# Altium PCB SwitchDecoder.PcbDoc
Units mm, origin at the board's own origin, x right, y up, seen from the top; angles counter-clockwise.
Board outline 152.4 x 101.6 mm, 2 copper layers (Top Layer, Bottom Layer); 67 components, 51 nets, 199 pads, 20 vias.
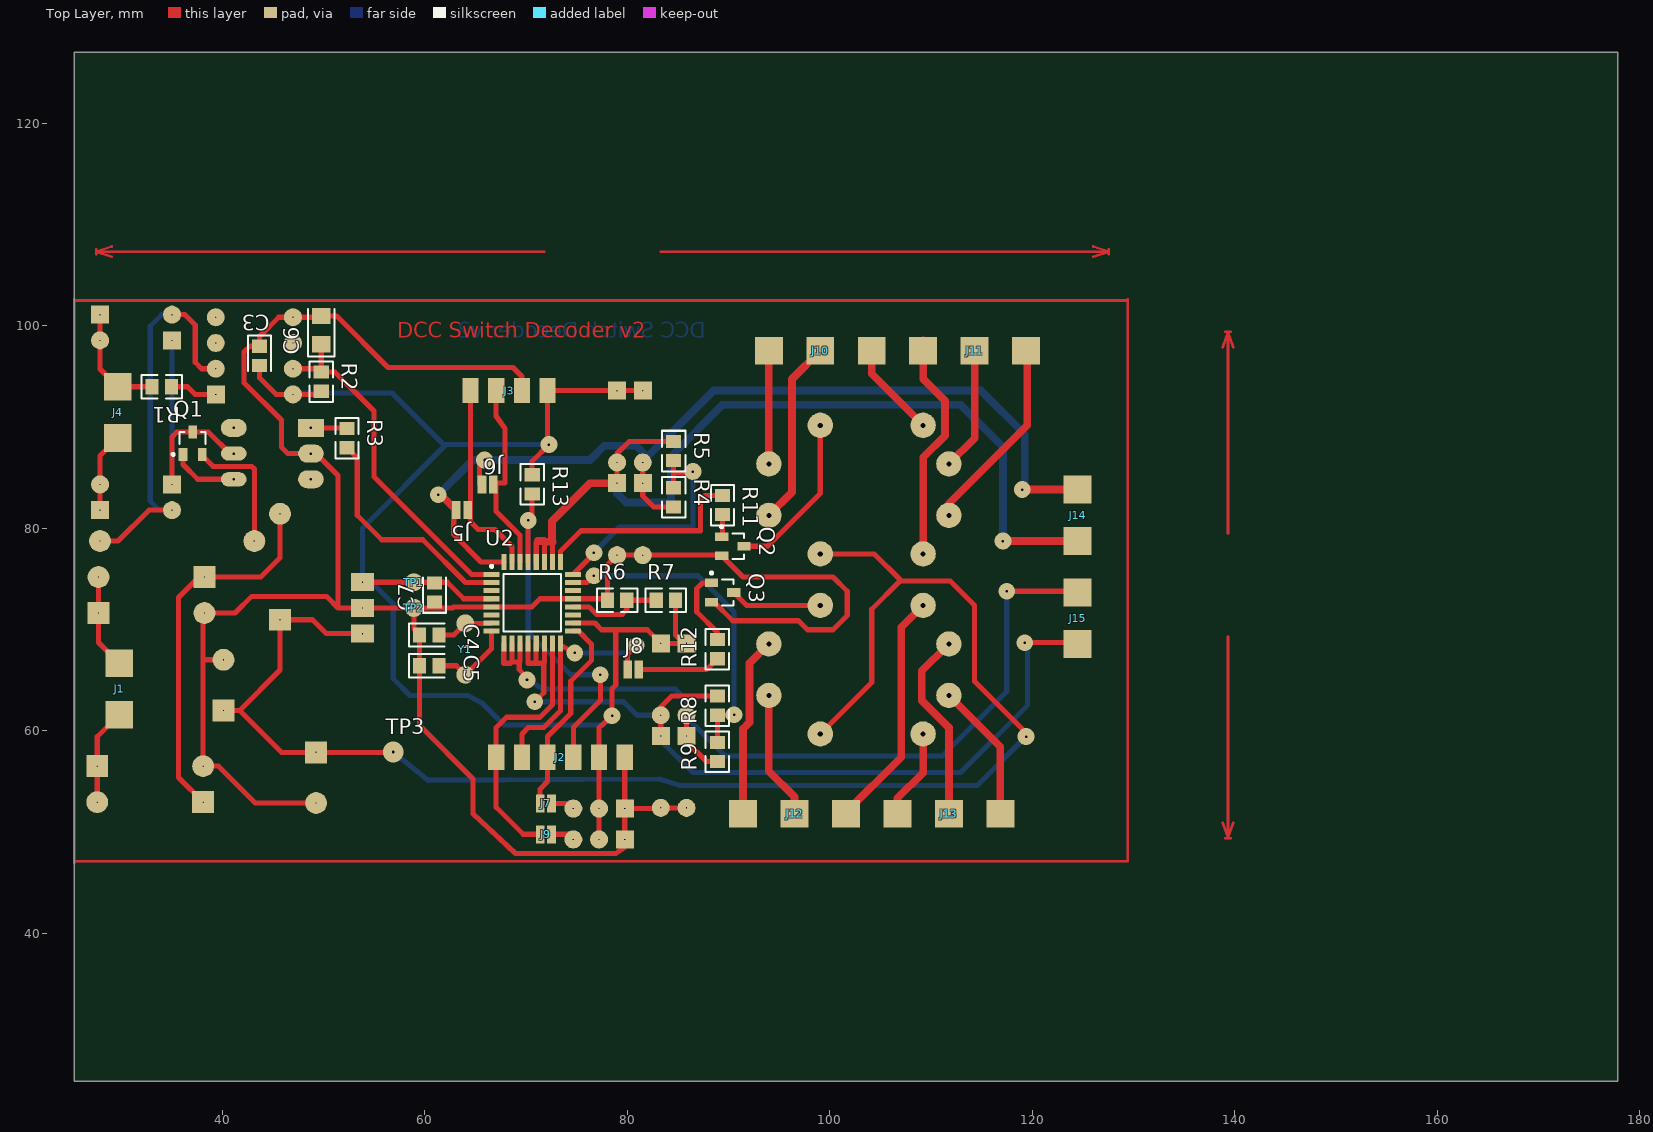
[diagram p0: Top Layer view]
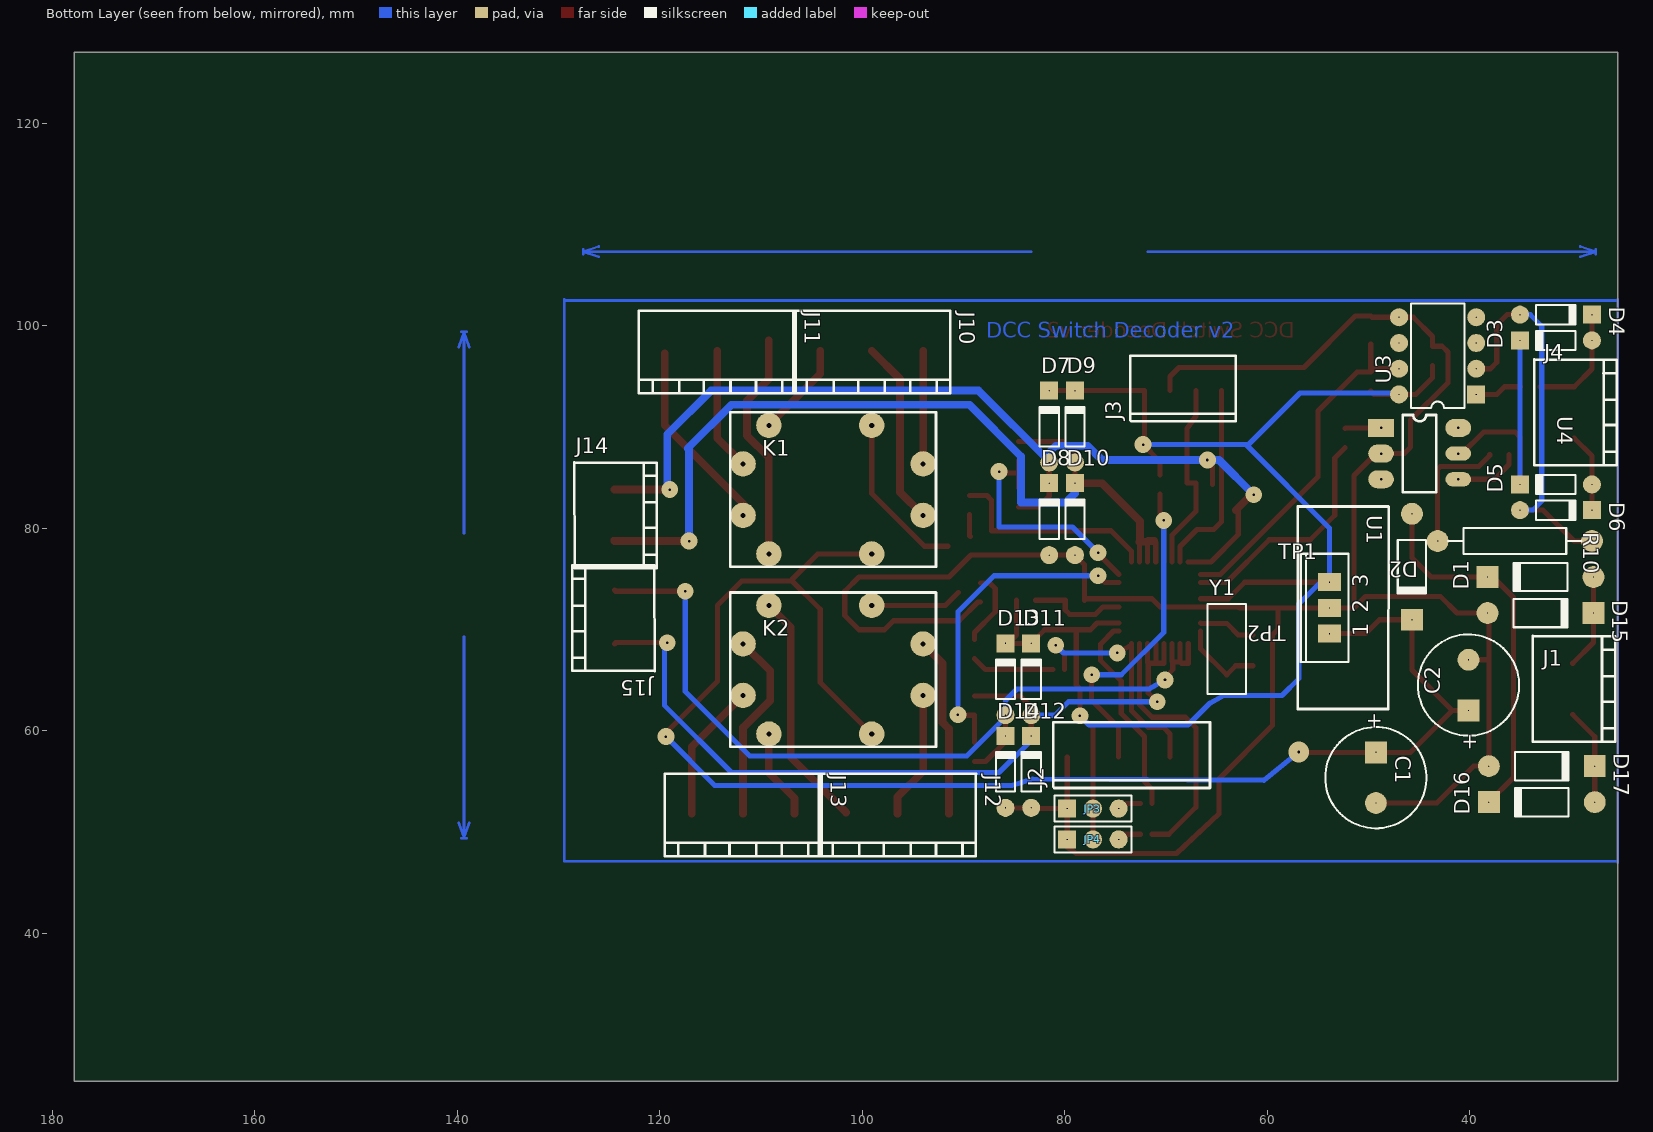
[diagram p1: Bottom Layer view, seen from below]

## Layer stack, top to bottom
Top Layer: signal copper 0.0356
Dielectric: dielectric 0.32, FR-4, Dk 4.8
Bottom Layer: signal copper 0.0356

## Board outline
25.4,25.4 177.8,25.4 177.8,127 25.4,127

## Design rules (kind name [scope] priority, off if disabled: settings)
Clearance [All] p1: gap=0.254
ComponentClearance [All] p1: gap=0.254 collisioncheckmode=0
PolygonConnect [All] p1: connectstyle=Relief reliefconductorwidth=0.254 reliefentries=4 polygonreliefangle="90 Angle"
RoutingLayers [All] p1: top layer=Horizontal bottom layer=Vertical
RoutingVias [All] p1: holewidth=0.711 width=1.27 viastyle="Through Hole" minholewidth=0.711 minwidth=1.27 maxholewidth=0.711 maxwidth=1.27
SolderMaskExpansion [All] p1: expansion=0.102
TestPointUsage [All] p1: valid=0 allowmultiple=FALSE
Testpoint [All] p1: side=15 testpointundercomponent=TRUE minsize=1.016 maxsize=2.54 preferedsize=1.524 minholesize=0 maxholesize=1.016 preferedholesize=0.813 testpointgrid=0.025 style=1023 order=1234567890
Width [All] p1: maxlimit=1.27 minlimit=0.254 preferedwidth=0.508
16 further rules are at their usual default settings.

## Components (designator, comment, footprint, x,y, rotation, side; value= is the part's Value field where it differs from the comment)
C1 "Cap Pol1" CAPPR5-10X10.5 49.276,55.372 r270 bottom
C2 "Cap Pol1" CAPPR5-10X10.5 40.132,64.516 r90 bottom
C3 "Cap" CC2012-0805 43.688,97.028 r270 top
C4 "Cap" CC2012-0805 60.452,69.469 r0 top
C5 "Cap" CC2012-0805 60.452,66.421 r0 top
C6 "Cap Pol1" CC3216-1206 49.784,99.568 r90 top
C7 "Cap" CC2012-0805 60.96,73.66 r90 top
D1 "Diode 1N4004" DIO10.46-5.3x2.8 33.02,75.184 r0 bottom
D2 "Diode 1N4001" DIO10.46-5.3x2.8 45.72,76.2 r270 bottom
D3 "Diode 1N4148" DIO7.1-3.9x1.9 31.496,98.552 r0 bottom
D4 "Diode 1N4148" DIO7.1-3.9x1.9 31.496,101.092 r180 bottom
D5 "Diode 1N4148" DIO7.1-3.9x1.9 31.496,84.328 r0 bottom
D6 "Diode 1N4148" DIO7.1-3.9x1.9 31.496,81.788 r180 bottom
D7 "Diode 1N4148" DIO7.1-3.9x1.9 81.534,90.043 r90 bottom
D8 "Diode 1N4148" DIO7.1-3.9x1.9 81.534,80.899 r90 bottom
D9 "Diode 1N4148" DIO7.1-3.9x1.9 78.994,90.043 r90 bottom
D10 "Diode 1N4148" DIO7.1-3.9x1.9 78.994,80.899 r90 bottom
D11 "Diode 1N4148" DIO7.1-3.9x1.9 83.312,65.09 r90 bottom
D12 "Diode 1N4148" DIO7.1-3.9x1.9 83.312,55.946 r90 bottom
D13 "Diode 1N4148" DIO7.1-3.9x1.9 85.852,65.09 r90 bottom
D14 "Diode 1N4148" DIO7.1-3.9x1.9 85.852,55.946 r90 bottom
D15 "Diode 1N4004" DIO10.46-5.3x2.8 33.02,71.628 r180 bottom
D16 "Diode 1N4004" DIO10.46-5.3x2.8 32.893,52.959 r0 bottom
D17 "Diode 1N4004" DIO10.46-5.3x2.8 32.893,56.515 r180 bottom
J1 "12V AC" "Screw Terminal 2 way 0.2" 27.305,59.055 r180 bottom
J2 "ISP Connector" "0.1 SIP 6 PIN" 74.676,59.944 r90 bottom
J3 "RS232 CONNECTOR" "0.1 SIP 4 PIN" 67.056,96.139 r90 bottom
J4 "Track Power" "Screw Terminal 2 way 0.2" 27.153,86.36 r180 bottom
J5 "Jumper" JUMPER 61.976,81.788 r180 top
J6 "Jumper" JUMPER 64.516,84.328 r180 top
J7 "Jumper" JUMPER 73.66,52.832 r0 top
J8 "Jumper" JUMPER 82.296,66.04 r0 top
J9 "Jumper" JUMPER 73.66,49.784 r0 top
J10 "Screw Terminal 3 Way" "Screw Terminal 3 way 0.2" 101.6,94.996 r270 bottom
J11 "Screw Terminal 3 Way" "Screw Terminal 3 way 0.2" 116.84,94.996 r270 bottom
J12 "Screw Terminal 3 Way" "Screw Terminal 3 way 0.2" 99.06,49.276 r270 bottom
J13 "Screw Terminal 3 Way" "Screw Terminal 3 way 0.2" 114.3,49.276 r270 bottom
J14 "Screw Terminal 2 Way" "Screw Terminal 2 way 0.2" 121.92,76.2 r180 bottom
J15 "Screw Terminal 2 Way" "Screw Terminal 2 way 0.2" 127,76.2 r0 bottom
JP3 "Header 3" HDR1X3 79.756,52.324 r180 bottom
JP4 "Header 3" HDR1X3 79.756,49.276 r180 bottom
K1 "Relay-DPDT" RelayDPDT 104.14,81.28 r180 bottom
K2 "Relay-DPDT" RelayDPDT 104.14,63.5 r180 bottom
Q1 "MMBT100A" SO-G3 37.084,88.392 r0 top
Q2 "MMBT100A" SO-G3 90.424,78.232 r270 top
Q3 "MMBT100A" SO-G3 89.408,73.66 r270 top
R1 "Res2" CR2012-0805 34.036,93.98 r180 top
R2 "Res2" CR2012-0805 49.784,94.488 r270 top
R3 "Res2" CR2012-0805 52.324,88.9 r270 top
R4 "Res2" CR2012-0805 84.582,83.058 r270 top
R5 "Res2" CR2012-0805 84.582,87.63 r270 top
R6 "Res2" CR2012-0805 78.994,72.898 r0 top
R7 "Res2" CR2012-0805 83.82,72.898 r0 top
R8 "Res2" CR2012-0805 88.9,62.484 r90 top
R9 "Res2" CR2012-0805 88.9,57.912 r90 top
R10 "1 Watt" AXIAL-0.6 35.56,78.74 r180 bottom
R11 "Res2" CR2012-0805 89.408,82.296 r270 top
R12 "Res2" CR2012-0805 88.9,68.072 r90 top
R13 "Res2" CR2012-0805 70.612,84.328 r270 top
TP1 "Test Point" TestPoint#1 58.928,74.676 r180 bottom
TP2 "Test Point" TestPoint#1 58.928,72.136 r270 bottom
TP3 "Test Point" TestPoint#2 56.896,57.912 r90 top
U1 "LM7805CT" "TO-3 with HS Clip" 53.848,72.136 r180 bottom
U2 "AT90LS4433-4AC" 32A 70.612,72.644 r0 top
U3 "HCPL-2530 Opto Coupler" 8P3 43.18,97.028 r90 bottom
U4 "4N25 Opto Coupler" DIP6 48.768,89.916 r180 bottom
Y1 "XTAL" RAD-0.2 64.008,68.072 r90 bottom

## Footprints (in the part's own frame and the unit in brackets; to place one, negate y for a bottom-side part, rotate by r counter-clockwise, add the part's x,y. Pads: shape width x height; smd on the part's side, far side on the other; paste and mask are expansions set on the pad)
"0.1 SIP 4 PIN" [mm] "0.1 SIP 4 PIN"
  rect 2.5x1.6 smd far side: 1(-2.54,5.08) 2(-2.54,2.54) 3(-2.54,0) 4(-2.54,-2.54)
  silkscreen extent -5.59,-3.94 0.89,6.48
"0.1 SIP 6 PIN" [mm] "0.1 SIP 6 PIN"
  rect 2.5x1.6 smd far side: 1(-2.54,5.08) 2(-2.54,2.54) 3(-2.54,0) 4(-2.54,-2.54) 5(-2.54,-5.08) 6(-2.54,-7.62)
  silkscreen extent -5.59,-9.02 0.89,6.48
8P3 [mil] "DIP; 8 Leads; Row Spacing 7.62 mm; Pitch 2.54 mm"
  rect 70x70 hole 5: 1(-150,-150)
  round 70 hole 5: 2(-50,-150) 3(50,-150) 4(150,-150) 5(150,150) 6(50,150) 7(-50,150) 8(-150,150)
  silkscreen extent -203,-104 203,104
32A [mm] "QFP; 32 Leads; Body 7 x 7 mm; Pitch 0.8 mm"
  rect 1.55x0.5 smd: 1(-4.025,2.8) 2(-4.025,2) 3(-4.025,1.2) 4(-4.025,0.4) 5(-4.025,-0.4) 6(-4.025,-1.2) 7(-4.025,-2) 8(-4.025,-2.8) 17(4.025,-2.8) 18(4.025,-2) 19(4.025,-1.2) 20(4.025,-0.4) 21(4.025,0.4) 22(4.025,1.2) 23(4.025,2) 24(4.025,2.8)
  rect 0.5x1.55 smd: 9(-2.8,-4.025) 10(-2,-4.025) 11(-1.2,-4.025) 12(-0.4,-4.025) 13(0.4,-4.025) 14(1.2,-4.025) 15(2,-4.025) 16(2.8,-4.025) 25(2.8,4.025) 26(2,4.025) 27(1.2,4.025) 28(0.4,4.025) 29(-0.4,4.025) 30(-1.2,4.025) 31(-2,4.025) 32(-2.8,4.025)
  silkscreen extent -4.12,-2.85 2.85,3.72
AXIAL-0.6 [mil]
  round 85 hole 5: 1(-300,0) 2(300,0)
  silkscreen extent -260,-50 260,50
CAPPR5-10X10.5 [mil]
  rect 85x85 hole 5: 1(-98.43,0)
  round 85 hole 5: 2(98.43,0)
  silkscreen extent -197,-197 197,197
CC2012-0805 [mm]
  rect 1.3x1.5 smd: 1(-0.95,0) 2(0.95,0)
  silkscreen extent -2,-1.15 1.5,1.15
CC3216-1206 [mm]
  rect 1.6x1.8 smd: 1(-1.4,0) 2(1.4,0)
  silkscreen extent -2.6,-1.3 2.1,1.3
CR2012-0805 [mm]
  rect 1.3x1.5 smd: 1(-0.95,0) 2(0.95,0)
  silkscreen extent -2,-1.15 2,1.15
DIO7.1-3.9x1.9 [mil]
  round 70 hole 5: 1(-139.76,0)
  rect 70x70 hole 5: 2(139.76,0)
  silkscreen extent -77,-37 81,37
DIO10.46-5.3x2.8 [mil]
  round 85 hole 5: 1(-205.91,0)
  rect 85x85 hole 5: 2(205.91,0)
  silkscreen extent -104,-56 108,55
DIP6 [mil]
  rect 100x70 hole 10: 1(0,0)
  oval 100x70 hole 10: 2(0,-100) 3(0,-200) 6(300,0)
  oval 100x55 hole 10: 4(300,-200) 5(300,-100)
  silkscreen extent 85,-250 215,50
HDR1X3 [mil] "Connector; Header; 3 Position"
  rect 70x70 hole 5: 1(0,0)
  round 70 hole 5: 2(100,0) 3(200,0)
  silkscreen extent -50,-50 250,50
JUMPER [mil]
  rect 33.46x70 smd: 1(-89,0) 2(-45,0)
RAD-0.2 [mil]
  round 70 smd far side: 1(-100,0) 2(100,0)
  silkscreen extent -175,-75 175,75
RelayDPDT [mm]
  round 2.5 hole 0.5: 1(10.16,5.08) 2(-5.08,8.89) 3(-7.62,5.08) 4(10.16,0) 5(-5.08,-3.81) 6(-7.62,0) 7(5.08,8.89) 8(5.08,-3.81)
  silkscreen extent -8.89,-5.08 11.43,10.16
"Screw Terminal 2 way 0.2" [mm]
  rect 2.75x2.75 smd far side: 1(-2.54,7.62) 2(-2.54,2.54)
  silkscreen extent -6.5,-0.15 1.65,10.31
"Screw Terminal 3 way 0.2" [mm]
  rect 2.75x2.75 smd far side: 1(-2.54,7.62) 2(-2.54,2.54) 3(-2.54,-2.54)
  silkscreen extent -6.5,-5.21 1.65,10.31
SO-G3 [mm]
  rect 0.85x1.3 smd: 1(-0.95,-1.1) 2(0.95,-1.1) 3(0,1.1)
  silkscreen extent -2.05,-1.22 1.28,1.1
TestPoint#1 [mil]
  round 70 smd far side: 1(0,0)
TestPoint#2 [mil]
  round 70 smd: 1(0,0)
"TO-3 with HS Clip" [mil]
  rect 90x70 hole 5: 1(0,-100) 2(0,0) 3(0,100)
  silkscreen extent -124,-393 230,394

## Part data
C1 C2 C6: "Polarized Capacitor (Radial)"
C3 C4 C5 C7: "Capacitor"
D1 D2 D15 D16 D17: "1 Amp General Purpose Rectifier"
D3 D4 D5 D6 D7 D8 D9 D10 D11 D12 D13 D14: "High Conductance Fast Diode"
J1 J4: library part "SIP2 CONNECTOR"
JP3 JP4: "Header, 3-Pin"
K1 K2: "Dual-Pole Dual-Throw Relay"
Q1 Q2 Q3: "General Purpose Amplifier NPN Silicon"
R1 R2 R3 R4 R5 R6 R7 R8 R9 R11 R12 R13: "Resistor"
R10: library part Res2, "Resistor"
TP1 TP2 TP3: library part TestPoint
U1: "Series 3-Terminal Positive Regulator"
U2: "8-Bit AVR Microcontroller with 4K Bytes of In-System Programmable Flash Memory"
U3: library part HCPL-2601
U4: library part 4N25
Y1: "Crystal Oscillator"

## Via types
v1: diameter 1.651, hole 0.254, Top Layer to Bottom Layer, 19 vias
v2: diameter 2.032, hole 0.254, Top Layer to Bottom Layer, 1 vias

## Nets (pads, with @x,y where several pads share a name; then routed paths per layer and width w, separated by ;. In a path a pad name is that pad's centre, name@x,y a point inside that pad or via, vN(x,y) a via of type N, cw(c..) or ccw(c..) an arc to the next point about the centre after c; other vN are vias at no path point)
ACK: R3.2 U2.2 | length 23.1
  Top Layer w0.508: R3.2 53.34,86.934 53.34,81.28 55.753,78.867 59.817,78.867 64.04,74.644 U2.2
DCCIN: C6.1 R2.1 U2.1 U3.7 | length 34.5
  Top Layer w0.508: U3.7 49.464,95.758 R2.1 ; C6.1 R2.1 ; U2.1 64.637,75.444 54.991,85.09 54.991,91.567 51.12,95.438 R2.1
GND: C1.2 C2.2 C3.1 C4.1 C5.1 C6.2 C7.1 D8.1 D10.1 D12.1 D14.1 D15.1 D17.1 J2.1 J3.2 JP3.1 JP4.1 Q2.2 Q3.2 R6.1 TP2.1 U1.2 U2.5 U2.21 U3.5 U4.2 | length 236
  Top Layer w0.508: 38.163,67.016 C2.2 ; C1.2 43.267,52.872 39.624,56.515 D17.1 38.123,71.501 D15.1 41.275,71.628 42.926,73.279 50.292,73.279 51.435,72.136 ; C6.2@49.654,100.838 45.593,100.838 43.688,98.933 C3.1 42.733,97.978 42.164,97.409 42.164,94.361 45.847,90.678 45.847,88.011 46.482,87.376 49.276,87.376 51.435,85.217 51.435,72.136 ; C6.2 51.305,100.968 56.388,95.885 68.707,95.885 69.596,94.996 J3.2 ; TP2.1 58.928,70.043 C4.1 59.502,60.513 64.77,55.245 64.77,51.816 68.961,47.879 78.867,47.879 79.756,48.514 J2.1 ; R6.1@77.898,73.044 71.393,73.044 70.593,72.244 62.846,72.244 62.738,72.136 51.435,72.136 ; R6.1 78.044,76.399 D10.1 89.257,77.349 91.422,75.184 100.33,75.184 101.727,73.787 101.727,71.374 100.33,69.977 97.79,69.977 96.901,70.866 90.424,70.866 88.58,72.71 Q3.2 ; JP3.1 83.24,52.324 D12.1 D14.1
NetC4_2: C4.2 U2.7 Y1.2 | length 5.7
  Top Layer w0.508: C4.2 62.865,69.469 Y1.2 66.555,70.612 U2.7
NetC5_2: C5.2 U2.8 Y1.1 | length 8.4
  Top Layer w0.508: C5.2 63.119,66.421 Y1.1 66.587,68.111 U2.8
NetD1_1: D1.1 D15.2 J1.1 | length 9.4
  Top Layer w0.508: D1.1 27.79,68.73 J1.1
NetD1_2: D1.2 D2.1 D16.2 | length 37.2
  Top Layer w0.508: D16.2 35.687,55.395 35.687,73.152 37.719,75.184 43.815,75.184 45.72,77.089 D2.1
NetD3_2: D3.2 D5.2 Q1.3 U4.5 | length 27.1
  Top Layer w0.508: D5.2 35.046,89.021 35.517,89.492 38.651,89.492 40.767,87.376 U4.5@42.164,87.376
  Bottom Layer w0.508: D5.2 D3.2
NetD4_1: D4.1 D6.1 R10.2 U3.2 | length 39.5
  Top Layer w0.508: R10.2 29.718,78.74 32.766,81.788 D6.1 ; D4.1 36.322,101.092 37.338,100.076 37.338,96.393 37.973,95.758 U3.2
  Bottom Layer w0.508: D6.1 33.782,81.788 32.893,82.677 32.893,99.949 34.036,101.092 D4.1
NetD7_1: D7.1 D8.2 J5.2 J6.2 J14.1 R4.2 U2.32 | length 97.2
  Top Layer w0.508: v1(61.341,83.312) v1@61.595,83.312 ; J5.2@62.865,81.788 62.865,79.375 65.571,76.669 U2.32 ; J6.2@65.405,84.328 65.405,86.233 v1(65.913,86.741) ; D7.1 81.534,83.185 82.611,82.108 R4.2
  Top Layer w0.762: v1@61.595,83.312 J5.2 ; v1(118.999,83.82) J14.1
  Bottom Layer w0.508: D7.1 81.534,87.503 ; v1(118.999,83.82) v1@119.253,84.074
  Bottom Layer w0.762: v1(61.341,83.312) 64.77,86.741 76.327,86.741 77.724,88.138 80.899,88.138 81.534,87.503 ; D7.1@81.534,86.614 88.519,93.599 114.935,93.599 119.253,89.281 v1@119.253,84.074
NetD9_1: D9.1 D10.2 J14.2 R5.1 U2.26 U2.27 U2.28 | length 91.5
  Top Layer w0.508: U2.28 71.012,78.594 ; U2.27 71.812,78.683 ; U2.26 72.612,78.645 ; D10.2 78.994,87.376 80.198,88.58 R5.1 ; J14.2 J14.2@124.587,78.867
  Top Layer w0.762: 71.374,78.74 71.158,78.74 71.755,78.74 71.812,78.683 72.574,78.683 ; 72.612,78.645 72.574,78.683 ; D10.2 76.321,84.449 72.574,80.702 72.574,78.683 ; v1(117.094,78.74) J14.2
  Bottom Layer w0.762: D10.2 78.994,83.439 79.883,82.55 84.328,82.55 84.328,84.582 84.328,87.122 89.408,92.202 112.903,92.202 117.221,87.884 ; v1(117.094,78.74) 117.094,88.011
NetD11_1: D11.1 D12.2 J15.1 R8.2 U2.12 U2.13 U2.14 | length 85.8
  Top Layer w0.508: U2.12 70.212,66.694 70.231,66.675 71.755,66.675 ; v1(70.866,62.865) 71.755,63.754 71.755,66.675 ; 70.866,66.675 70.993,66.802 70.993,68.6 U2.13 ; U2.14 71.812,66.732 71.755,66.675 ; D12.2 83.312,62.357 84.389,63.434 R8.2 ; v1(119.253,68.707) 124.333,68.707 J15.1
  Bottom Layer w0.508: v1(70.866,62.865) 79.629,62.865 80.954,61.54 D11.1 ; D12.2 83.312,59.055 86.487,55.88 112.903,55.88 119.507,62.484 119.507,68.453 v1(119.253,68.707)
NetD13_1: D13.1 D14.2 J15.2 R9.1 U2.9 U2.10 U2.11 | length 86.9
  Top Layer w0.508: U2.9 67.812,66.669 67.818,66.675 68.453,66.675 68.612,66.834 ; U2.10 68.612,66.834 ; U2.11 69.412,66.872 69.342,66.802 ; v1(70.104,65.024) 70.104,65.278 69.342,66.04 69.342,66.802 ; D13.1@85.725,61.722 85.852,61.595 85.852,58.928 87.818,56.962 R9.1 ; v1(117.475,73.787) 124.333,73.787 J15.2@124.46,73.914 ; 68.612,66.834 68.644,66.802 69.342,66.802
  Bottom Layer w0.508: v1(70.104,65.024) 71.628,64.135 84.709,64.135 85.852,62.992 85.852,61.341 89.662,57.531 111.125,57.531 117.475,63.881 v1(117.475,73.787)
NetD16_1: D16.1 D17.2 J1.2 | length 9.5
  Top Layer w0.508: D16.1 27.663,59.413 J1.2
NetJ2_3: J2.3 R13.2 U2.29 | length 36
  Top Layer w0.508: U2.29 70.212,80.753 70.612,81.153 R13.2 ; J2.3 74.676,60.325 77.343,62.992 v1(77.343,65.532)
  Bottom Layer w0.508: v1(70.231,80.772) 70.231,69.723 74.422,65.532 v1(77.343,65.532)
NetJ2_4: J2.4 J7.1 U2.17 | length 20.2
  Top Layer w0.508: J7.1 71.399,54.254 72.136,54.991 72.136,59.436 74.422,61.722 74.422,64.897 76.454,66.929 76.454,68.58 75.19,69.844 U2.17
NetJ2_5: J2.5 J8.1 U2.16 | length 24.5
  Top Layer w0.508: J2.5 69.596,59.69 70.231,60.325 71.755,60.325 73.412,61.982 U2.16 ; U2.16@73.412,68.447 v1(74.803,67.691) ; J8.1 80.035,67.589 v1(80.899,68.453)
  Bottom Layer w0.508: v1(74.803,67.691) 80.137,67.691 v1(80.899,68.453)
NetJ2_6: J2.6 J9.1 U2.15 | length 25.9
  Top Layer w0.508: J9.1 69.723,49.784 67.056,52.451 67.056,60.325 68.072,61.341 71.374,61.341 72.612,62.579 U2.15
NetJ3_3: J3.3 J6.1 U2.30 | length 19.1
  Top Layer w0.508: J3.3 67.056,91.059 67.945,89.789 67.945,84.455 67.056,84.455 67.056,81.661 69.412,79.305 U2.30
NetJ3_4: J3.4 J5.1 U2.31 | length 19.6
  Top Layer w0.508: J3.4 64.516,80.645 65.278,79.883 66.929,79.883 68.612,78.2 U2.31
NetJ7_2: J7.2 JP3.3 | length 2.4
  Top Layer w0.508: J7.2 74.168,52.832 JP3.3
NetJ8_2: J8.2 R12.1 | length 8.2
  Top Layer w0.508: J8.2 87.818,66.04 R12.1
NetJ9_2: J9.2 JP4.3 | length 2.4
  Top Layer w0.508: J9.2 74.168,49.784 JP4.3
NetJ10_1: J10.1 K1.1 | length 11.2
  Top Layer w0.762: K1.1 J10.1
NetJ10_2: J10.2 K1.4 | length 18.4
  Top Layer w0.762: K1.4 96.266,83.566 96.266,94.742 J10.2
NetJ10_3: J10.3 K1.2 | length 9.5
  Top Layer w0.762: J10.3 104.14,95.25 K1.2
NetJ11_1: J11.1 K1.5 | length 22.9
  Top Layer w0.762: K1.5 109.22,86.995 111.379,89.154 111.379,92.583 109.22,94.742 J11.1@109.22,98.552
NetJ11_2: J11.2 K1.3 | length 12.2
  Top Layer w0.762: K1.3 114.3,88.9 J11.2
NetJ11_3: J11.3 K1.6 | length 19.2
  Top Layer w0.762: K1.6 111.76,82.423 119.507,90.17 J11.3@119.507,97.282
NetJ12_1: J12.1 K2.1 | length 17.8
  Top Layer w0.762: J12.1 91.44,60.198 92.075,60.833 92.075,66.675 K2.1
NetJ12_2: J12.2 K2.4 | length 12.7
  Top Layer w0.762: K2.4 93.98,56.007 96.52,53.467 J12.2
NetJ12_3: J12.3 K2.2 | length 23.7
  Top Layer w0.508: J12.3 J12.3@101.6,51.943
  Top Layer w0.762: J12.3@101.6,51.943 107.061,57.404 107.061,70.231 K2.2
NetJ13_1: J13.1 K2.5 | length 8.9
  Top Layer w0.762: J13.1 106.68,53.34 109.22,55.88 K2.5
NetJ13_2: J13.2 K2.3 | length 18.8
  Top Layer w0.762: K2.3@111.633,68.453 109.093,65.913 109.093,62.992 111.76,60.325 J13.2
NetJ13_3: J13.3 K2.6 | length 13.8
  Top Layer w0.762: K2.6 116.84,58.42 J13.3
NetK1_7: K1.7 Q2.3 | length 16.4
  Top Layer w0.508: Q2.3 93.853,78.232 99.06,83.439 K1.7
NetK2_7: K2.7 Q3.3 | length 9.1
  Top Layer w0.508: Q3.3 91.778,72.39 K2.7
NetQ1_1: Q1.1 U4.4 | length 6.6
  Top Layer w0.508: Q1.1 36.134,86.294 37.592,84.836 U4.4
NetQ1_2: Q1.2 R10.1 | length 12.9
  Top Layer w0.508: Q1.2 38.034,87.188 39.116,86.106 42.926,86.106 43.18,85.852 R10.1
NetQ2_1: Q2.1 R11.2 | length 2.2
  Top Layer w0.508: Q2.1 89.408,79.266 R11.2
NetQ3_1: Q3.1 R12.2 | length 7.6
  Top Layer w0.508: Q3.1@88.331,74.61 87.437,74.61 86.868,74.041 86.868,71.755 88.9,69.723 R12.2
NetR1_1: R1.1 U3.1 | length 4.7
  Top Layer w0.508: R1.1 36.576,93.98 37.338,93.218 U3.1
NetR3_1: R3.1 U4.1 | length 3.6
  Top Layer w0.508: U4.1 52.258,89.916 R3.1
NetR4_1: R4.1 R5.2 U2.24 | length 23.9
  Top Layer w0.508: U2.24 76.708,77.515 v1(76.708,77.597) ; R4.1 R5.2 ; 84.582,85.471 86.36,85.471 v1(86.487,85.598)
  Bottom Layer w0.508: v1(76.708,77.597) 79.248,80.137 86.487,80.137 86.487,85.344 v1(86.487,85.598)
NetR6_2: R6.2 R7.1 U2.20 | length 9.7
  Top Layer w0.508: U2.20 76.219,72.244 76.962,71.501 79.502,71.501 79.944,71.943 R6.2 R7.1
NetR8_1: R8.1 R9.2 U2.23 | length 32.2
  Top Layer w0.508: U2.23 76.041,74.644 v1(76.708,75.311) ; R9.2 R8.1 90.485,61.534 v1(90.546,61.595)
  Bottom Layer w0.508: v1(76.708,75.311) 86.995,75.311 90.546,71.76 v1(90.546,61.595)
NetR11_1: R11.1 U2.25 | length 21.1
  Top Layer w0.508: U2.25 73.412,77.73 75.438,79.756 87.249,79.756 87.249,82.804 87.691,83.246 R11.1
TRACKA: D3.1 D4.2 J4.1 R1.2 | length 11.2
  Top Layer w0.508: D4.2 27.946,95.727 J4.1 R1.2
TRACKB: D5.1 D6.2 J4.2 | length 7.8
  Top Layer w0.508: D6.2 27.946,87.153 J4.2
VCC: C3.2 C7.2 D7.2 D9.2 D11.2 D13.2 J2.2 J3.1 JP3.2 JP4.2 R2.2 R7.2 R13.1 TP1.1 U1.3 U2.4 U2.18 U3.8 | length 157.9
  Top Layer w0.508: C3.2 43.688,94.869 45.339,93.218 49.464,93.218 R2.2 ; U1.3 62.23,74.676 63.862,73.044 U2.4 ; R13.1 70.612,86.614 v1(72.263,88.265) 72.136,88.392 J3.1 78.988,93.599 D9.2 ; U2.18 76.803,70.644 77.47,69.977 81.975,69.977 D11.2 D13.2 ; JP4.2 77.216,60.325 v1(78.498,61.48) ; v1@78.498,61.607 v1(78.498,61.48) ; 78.74,69.977 78.867,69.85 78.867,64.516 78.498,64.147 v1(78.498,61.48) ; D9.2@78.873,93.593 D7.2 ; R7.2 84.77,69.468 D13.2@85.598,68.64
  Bottom Layer w0.508: U3.8 47.117,93.345 56.769,93.345 61.849,88.265 v1(72.263,88.265) ; 62.103,88.265 53.848,80.01 U1.3 54.737,74.676 56.896,72.517 56.896,65.151 58.547,63.5 64.262,63.5 65.659,62.738 67.818,60.579 77.597,60.579 v1(78.498,61.48)
VDD: C1.1 C2.1 D2.2 K1.8 K2.8 TP3.1 U1.1 | length 154.2
  Top Layer w0.508: C2.1 41.743,62.016 ; U1.1 50.292,69.596 48.918,70.97 D2.2 45.72,65.993 41.743,62.016 ; v2(56.896,57.912) 56.856,57.872 45.887,57.872 41.743,62.016 ; K2.8 104.14,64.77 104.14,72.009 106.934,74.803 ; K1.8 104.394,77.47 106.934,74.93 106.934,74.803 ; v1(119.38,59.436) 119.38,59.817 114.3,64.897 114.3,72.39 111.887,74.803 106.934,74.803
  Bottom Layer w0.508: v2(56.896,57.912) 60.325,55.118 83.185,55.245 85.217,54.61 114.554,54.61 v1(119.38,59.436)
pads on no net: U2.3 U2.6 U2.19 U2.22 U3.3 U3.4 U3.6 U4.3 U4.6
copper on no net: | length 0.2
  Top Layer w0.254: 25.4,46.99 25.527,47.117

## Other copper
Top Layer:
  text "DCC Switch Decoder v2" at 57.277,98.806 h1.52
Bottom Layer:
  text "DCC Switch Decoder v2" at 87.757,98.806 h1.52
Multi-Layer:
  lines w0.254: 25.4,46.99 25.4,102.616 ; 25.4,102.489 129.413,102.489 ; 25.527,47.117 129.413,47.117 129.413,102.616 ; 27.559,107.061 27.559,107.569 ; 29.083,106.807 27.559,107.315 ; 29.083,107.823 27.559,107.315 ; 71.82,107.315 27.559,107.315 ; 83.298,107.315 127.559,107.315 ; 126.035,106.807 127.559,107.315 ; 126.035,107.823 127.559,107.315 ; 127.559,107.061 127.559,107.569 ; 138.811,50.927 139.319,49.403 ; 138.811,97.879 139.319,99.403 ; 139.065,49.403 139.573,49.403 ; 139.065,99.403 139.573,99.403 ; 139.319,69.299 139.319,49.403 ; 139.319,79.507 139.319,99.403 ; 139.827,50.927 139.319,49.403 ; 139.827,97.879 139.319,99.403
  text "100 (mm)" at 72.074,106.401 h1.52
  text "50 (mm)" at 140.233,69.553 h1.52 r90

## Text inside footprints (layer, text, board x,y; h text height)
C1: Bottom Overlay "+" at 50.026,61.847 h1.5 r90
C2: Bottom Overlay "+" at 39.382,58.041 h1.5 r270
U1: Bottom Overlay "3" at 50.023,74.176 h1.5 r270; Bottom Overlay "1" at 50.023,69.346 h1.5 r270; Bottom Overlay "2" at 50.023,71.636 h1.5 r270